# Altium PCB Motor-42.PcbDoc
Units mm, origin at the board's own origin, x right, y up, seen from the top; angles counter-clockwise.
Board outline 42.29 x 42.29 mm, 2 copper layers (Top Layer, Bottom Layer); 32 components, 33 nets, 185 pads, 49 vias.
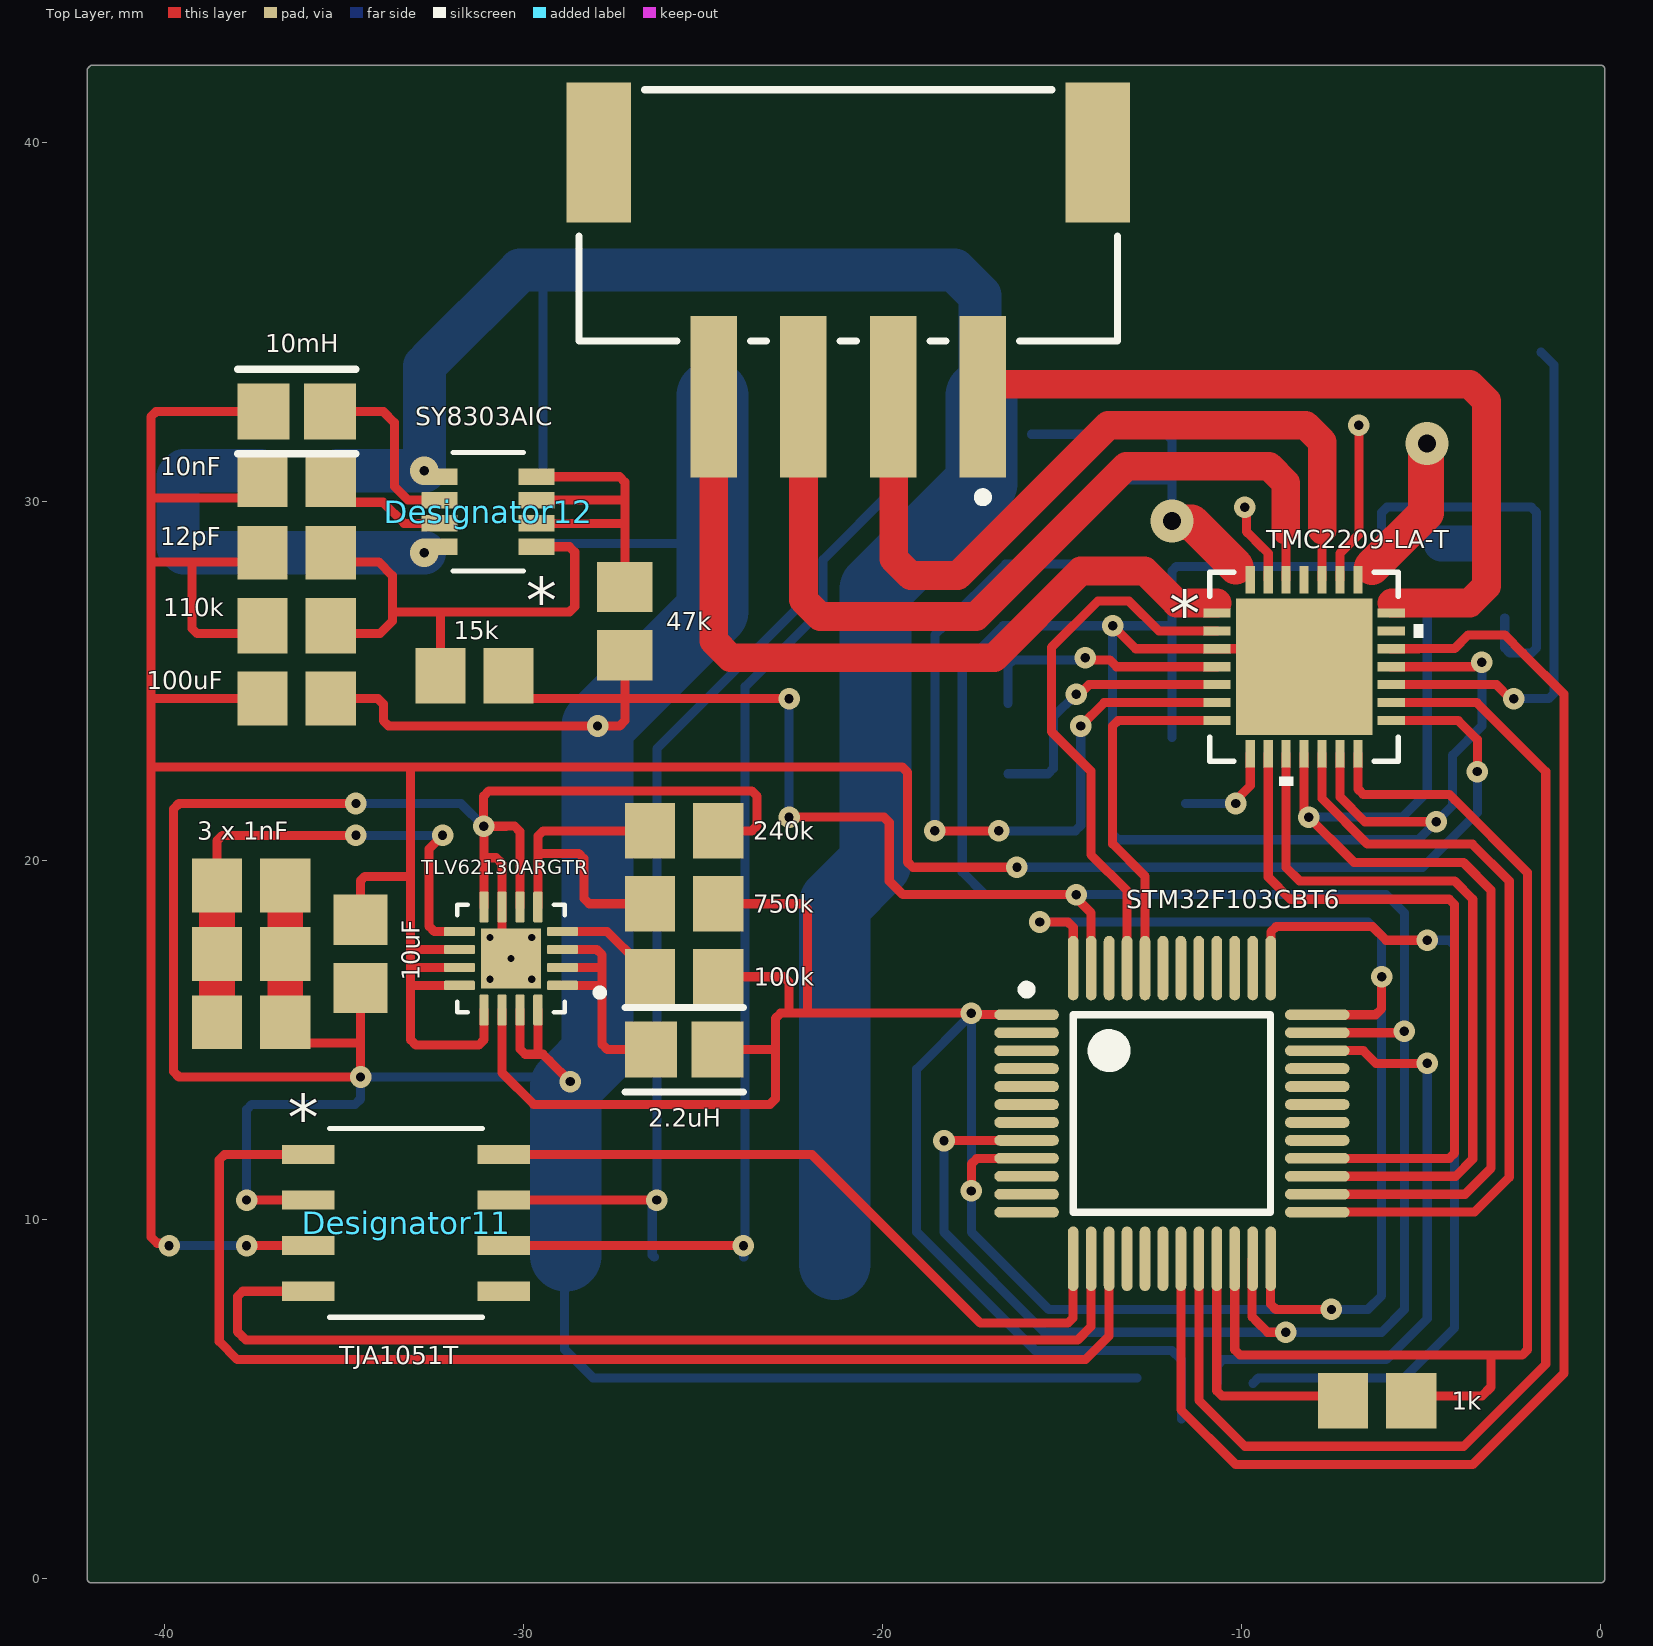
[diagram p0: Top Layer view]
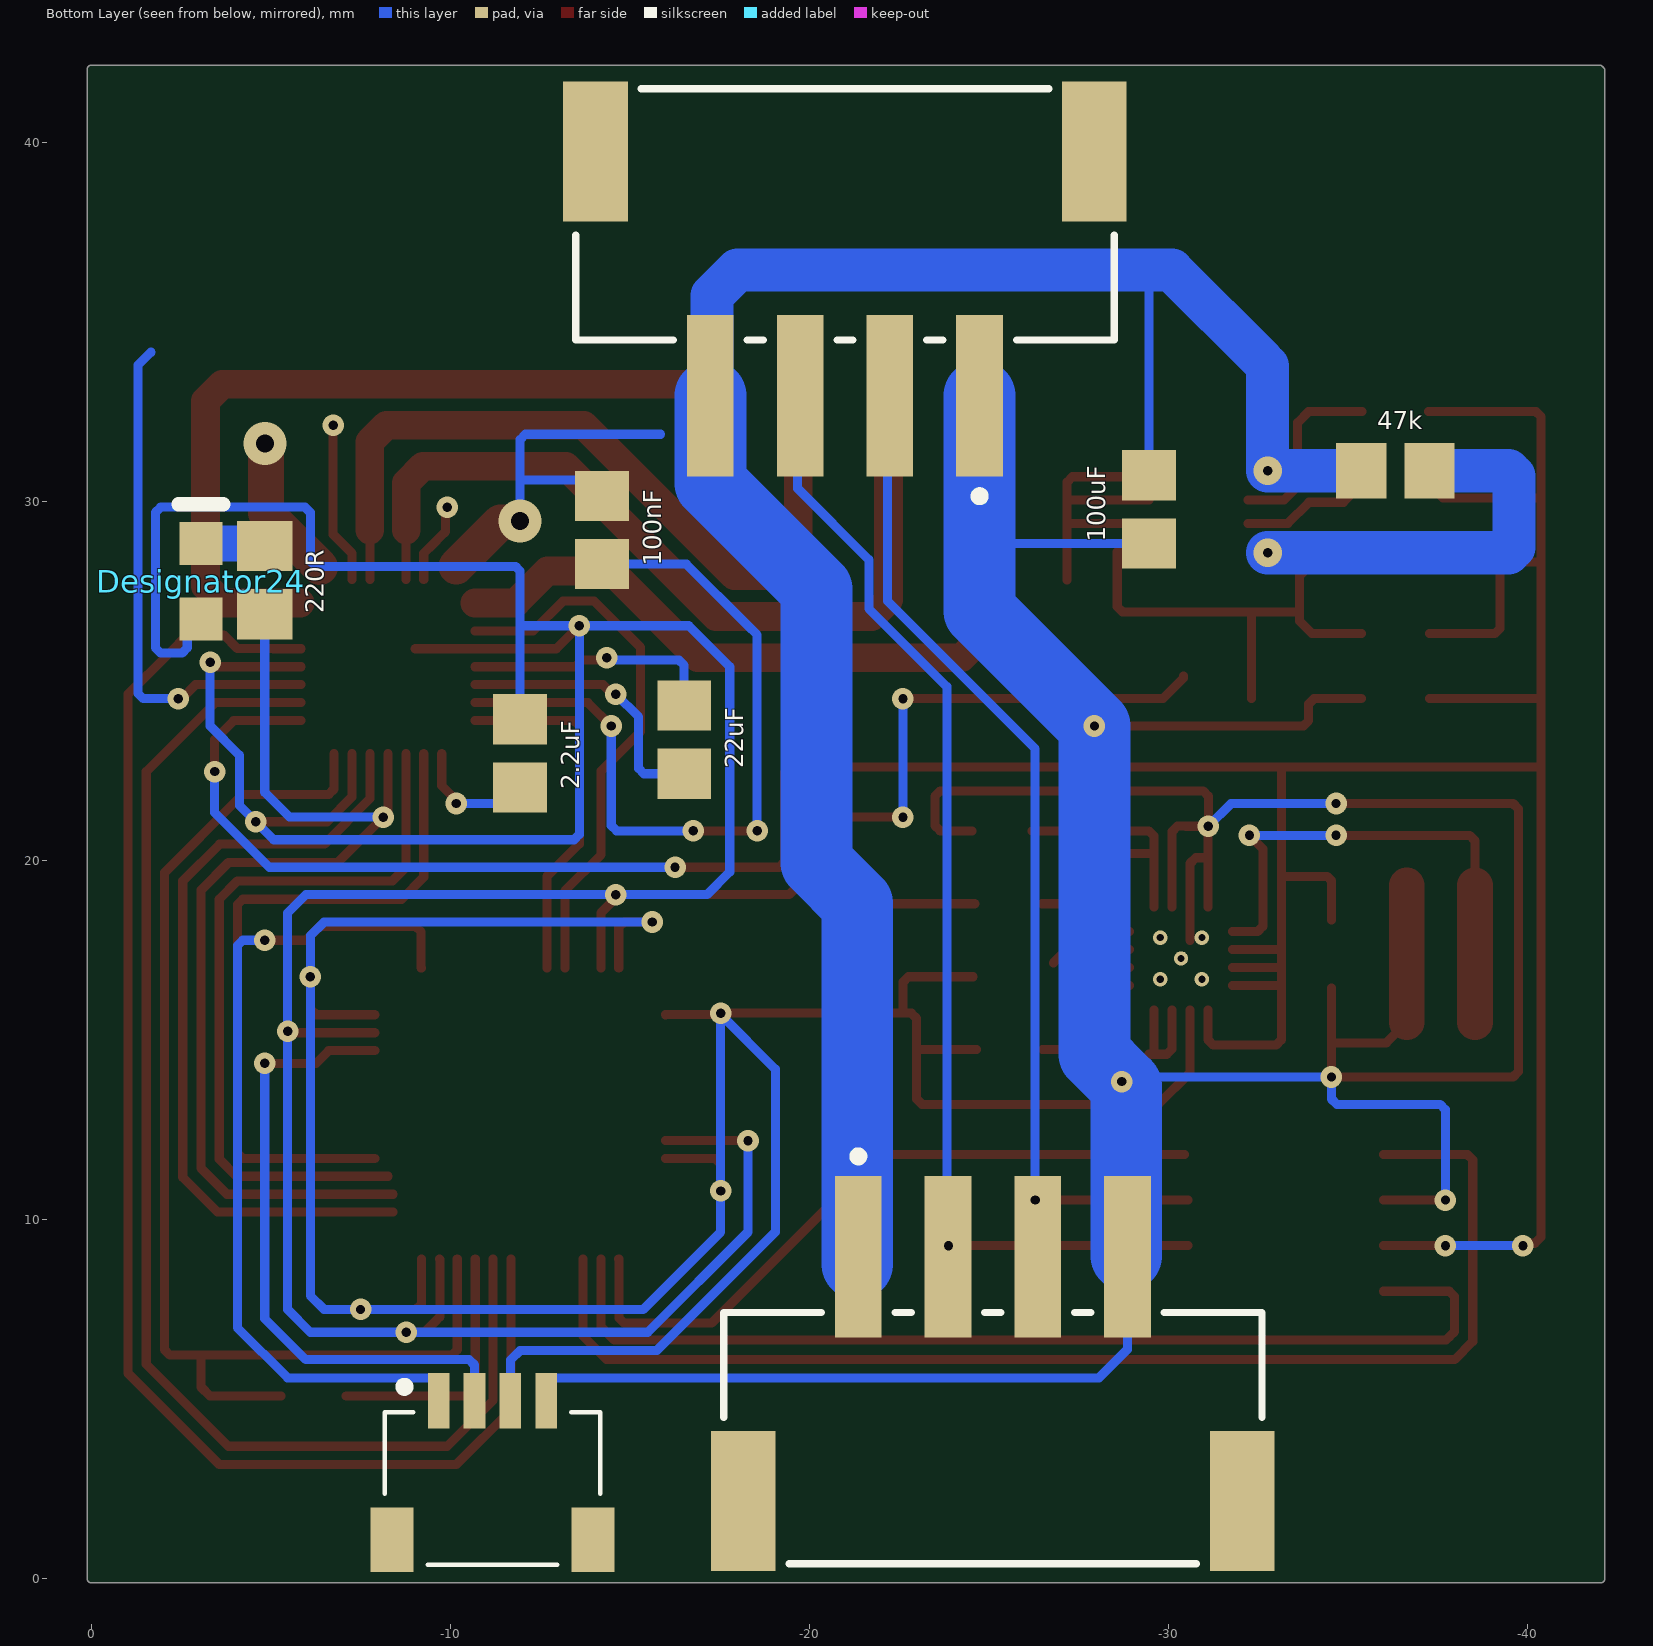
[diagram p1: Bottom Layer view, seen from below]

## Layer stack, top to bottom
Top Solder: solder mask 0.0102, Solder Resist, Dk 3.5
Top Layer: signal copper 0.0356
Dielectric 1: dielectric 0.32, FR-4, Dk 4.8
Bottom Layer: signal copper 0.0356
Bottom Solder: solder mask 0.0102, Solder Resist, Dk 3.5

## Board outline
-42.164,0 -42.164,42 cw(c-42.037,42) -42.107,42.107 cw(c-42,42.037) -42,42.164 0,42.164 cw(c0,42.037) 0.127,42.037 0.127,0 cw(c0,0) 0,-0.127 -42.037,-0.127 cw(c-42.037,0)

## Design rules (kind name [scope] priority, off if disabled: settings)
Clearance [All] p1: gap=0.26 ignorepadtopadclearanceinfootprint=FALSE
PolygonConnect [All] p1: connectstyle=Relief reliefconductorwidth=0.254 reliefentries=4 polygonreliefangle="90 Angle" airgapwidth=0.254
RoutingVias [All] p1: holewidth=0.26 width=0.6 viastyle="Through Hole" minholewidth=0.1 minwidth=0.1 maxholewidth=0.26 maxwidth=2
SolderMaskExpansion [All] p1: expansion=0.102 istentingtop=FALSE
Width Width_POWER [(InNet('VCC') OR InNet('GND'))] p1: maxlimit=3 minlimit=2 preferedwidth=2.5
Width [All] p2: maxlimit=3 minlimit=0.254 preferedwidth=0.254
30 further rules are at their usual default settings.

## Components (designator, comment, footprint, x,y, rotation, side; value= is the part's Value field where it differs from the comment)
Designator11 "TJA1051T" SO8_SOT96-1_NXP -33.274,9.906 r0 top
Designator12 "SY8303AIC" TSOT_303AIC_SGY -30.988,29.718 r180 top
Designator24 "Comment" AVAG-HSMX-C170_V -3.048,27.779 r90 bottom
STM32F103CBT6 "Comment" LQFP48_N -11.938,12.954 r0 top
TLV62130ARGTR "Comment" QFN50P300X300X100-17N -30.353,17.272 r180 top
TMC2209-LA-T "Comment" QFN28_5X5_3X8_EPAD_TRI -8.255,25.4 r0 top
? "Comment" JST_SM04B-SRSS-TB(LF)(SN) -11.168,4.953 r180 bottom
? "100uF" MURA-0805_H_1.35_M -29.464,29.784 r90 bottom
? "47k" RESC2013X60X40ML20T25 -36.322,30.861 r180 bottom
? "100uF" MURA-0805_H_1.35_M -36.322,24.511 r0 top
? "100nF" MURA-0805_H_1.35_M -14.224,29.21 r90 bottom
? "22uF" MURA-0805_H_1.35_M -16.51,23.368 r90 bottom
? "Comment" FP-S4B-XH-SM4-TB_LF_SN-MFG -20.955,37.973 r180 top
? "Comment" FP-S4B-XH-SM4-TB_LF_SN-MFG -20.99,38.001 r0 bottom
? "Comment" FP-S4B-XH-SM4-TB_LF_SN-MFG -25.111,3.909 r180 bottom
? "15k" RESC2013X60X40ML20T25 -31.369,25.146 r0 top
? "110k" RESC2013X60X40ML20T25 -36.322,26.543 r0 top
? "12pF" MURA-0805_H_1.35_M -36.322,28.575 r0 top
? "10nF" MURA-0805_H_1.35_M -36.322,30.607 r0 top
? "10mH" FP-LQM21PN_C0-IPC_A -36.322,32.512 r0 top
? "47k" RESC2013X60X40ML20T25 -27.178,26.67 r90 top
? "220R" RESC2013X60X40ML20T25 -4.826,27.813 r90 bottom
? "2.2uF" MURA-0805_H_1.35_M -11.938,22.987 r90 bottom
? "1k" RESC2013X60X40ML20T25 -6.223,4.953 r0 top
? "100k" RESC2013X60X40ML20T25 -25.527,16.764 r0 top
? "240k" RESC2013X60X40ML20T25 -25.527,20.828 r0 top
? "750k" RESC2013X60X40ML20T25 -25.527,18.796 r0 top
? "Comment" MURA-0805_H_1.35_M -37.592,15.494 r0 top
? "3 x 1nF" MURA-0805_H_1.35_M -37.592,19.304 r0 top
? "Comment" MURA-0805_H_1.35_M -37.592,17.399 r0 top
? "2.2uH" FP-LQM21PN_C0-IPC_A -25.527,14.732 r0 top
? "10uF" MURA-0805_H_1.35_M -34.544,17.399 r90 top

## Footprints (in the part's own frame and the unit in brackets; to place one, negate y for a bottom-side part, rotate by r counter-clockwise, add the part's x,y. Pads: shape width x height; smd on the part's side, far side on the other; paste and mask are expansions set on the pad)
AVAG-HSMX-C170_V [mm] "SMD, 2-Leads, Body 2x1.25mm, Height 0.8mm"
  rect 1.2x1.2 smd: 1(-1.05,0) 2(1.05,0)
  silkscreen extent 2.15,-0.63 2.15,0.63, body extent -1,-0.63 1,0.63, height 0.8
FP-LQM21PN_C0-IPC_A [mm]
  rect 1.455x1.556 smd paste+0 mask+0: 1(-0.926,0) 2(0.926,0)
  silkscreen extent -1.65,-1.18 1.65,1.18, body extent -2.15,-1.28 2.15,1.28, height 0.25
FP-S4B-XH-SM4-TB_LF_SN-MFG [mm]
  rect 1.3x4.5 smd paste+0 mask+0: 1(-3.75,5.05) 2(-1.25,5.05) 3(1.25,5.05) 4(3.75,5.05)
  rect 1.8x3.9 smd paste+0 mask+0: 5(-6.95,-1.75) 6(6.95,-1.75)
  silkscreen extent -7.5,-3.5 7.5,7.97, body extent -7.47,-3.5 7.47,6.5, height 6
JST_SM04B-SRSS-TB(LF)(SN) [mm]
  rect 0.6x1.55 smd: 1(-1.5,0) 2(-0.5,0) 3(0.5,0) 4(1.5,0)
  rect 1.2x1.8 smd: S1(-2.8,-3.875) S2(2.8,-3.875)
  silkscreen extent -3,-4.57 3,0.48
LQFP48_N [mm] "Thin QFP, 48-Leads, Body 7x7mm, Pitch 0.5mm, IPC Medium Density"
  oval 1.8x0.3 smd: 1(-4.05,2.75) 2(-4.05,2.25) 3(-4.05,1.75) 4(-4.05,1.25) 5(-4.05,0.75) 6(-4.05,0.25) 7(-4.05,-0.25) 8(-4.05,-0.75) 9(-4.05,-1.25) 10(-4.05,-1.75) 11(-4.05,-2.25) 12(-4.05,-2.75) 25(4.05,-2.75) 26(4.05,-2.25) 27(4.05,-1.75) 28(4.05,-1.25) 29(4.05,-0.75) 30(4.05,-0.25) 31(4.05,0.25) 32(4.05,0.75) 33(4.05,1.25) 34(4.05,1.75) 35(4.05,2.25) 36(4.05,2.75)
  oval 0.3x1.8 smd: 13(-2.75,-4.05) 14(-2.25,-4.05) 15(-1.75,-4.05) 16(-1.25,-4.05) 17(-0.75,-4.05) 18(-0.25,-4.05) 19(0.25,-4.05) 20(0.75,-4.05) 21(1.25,-4.05) 22(1.75,-4.05) 23(2.25,-4.05) 24(2.75,-4.05) 37(2.75,4.05) 38(2.25,4.05) 39(1.75,4.05) 40(1.25,4.05) 41(0.75,4.05) 42(0.25,4.05) 43(-0.25,4.05) 44(-0.75,4.05) 45(-1.25,4.05) 46(-1.75,4.05) 47(-2.25,4.05) 48(-2.75,4.05)
  silkscreen extent -4.17,-2.75 2.75,3.57, body extent -3.5,-3.5 3.5,3.5, height 1.6
MURA-0805_H_1.35_M [mm] "SMD, 2-Leads, Body 2.1x1.35mm, IPC Low Density"
  rect 1.4x1.5 smd: 1(-0.95,0) 2(0.95,0)
  body extent -1.05,-0.67 1.05,0.67, height 1.35
QFN28_5X5_3X8_EPAD_TRI [mil]
  rect 30x10 smd paste+0 mask+0: 1(-95.5,59.06) 2(-95.5,39.37) 3(-95.5,19.68) 4(-95.5,0) 5(-95.5,-19.68) 6(-95.5,-39.37) 7(-95.5,-59.06) 15(95.5,-59.06) 16(95.5,-39.37) 17(95.5,-19.68) 18(95.5,0) 19(95.5,19.68) 20(95.5,39.37) 21(95.5,59.06)
  rect 10x30 smd paste+0 mask+0: 8(-59.06,-95.5) 9(-39.37,-95.5) 10(-19.69,-95.5) 11(0,-95.5) 12(19.69,-95.5) 13(39.37,-95.5) 14(59.06,-95.5) 22(59.06,95.5) 23(39.37,95.5) 24(19.69,95.5) 25(0,95.5) 26(-19.69,95.5) 27(-39.37,95.5) 28(-59.06,95.5)
  rect 149.61x149.61 smd paste+0 mask+0: 29(0,0)
  silkscreen extent -104,-130 130,104, body extent -99,-99 99,99, height 35
QFN50P300X300X100-17N [mm]
  rrect25% 0.86x0.26 smd: 1(-1.435,0.75) 2(-1.435,0.25) 3(-1.435,-0.25) 4(-1.435,-0.75) 9(1.435,-0.75) 10(1.435,-0.25) 11(1.435,0.25) 12(1.435,0.75)
  rrect25% 0.26x0.86 smd: 5(-0.75,-1.435) 6(-0.25,-1.435) 7(0.25,-1.435) 8(0.75,-1.435) 13(0.75,1.435) 14(0.25,1.435) 15(-0.25,1.435) 16(-0.75,1.435)
  rect 1.68x1.68 smd paste-0.31: 17(0,0)
  round 0.4 hole 0.2 mask+0: 18(0,0) 19(-0.58,0.58) 20(0.58,0.58) 21(-0.58,-0.58) 22(0.58,-0.58)
  silkscreen extent -2.57,-1.5 1.5,1.5, body extent -1.5,-1.5 1.5,1.5, height 1
RESC2013X60X40ML20T25 [mm] "Chip Resistor, 2-Leads, Body 2.00x1.25mm, IPC Low Density"
  rect 1.4x1.55 smd: 1(-0.95,0) 2(0.95,0)
  body extent -1.1,-0.72 1.1,0.72, height 0.6
SO8_SOT96-1_NXP [mil]
  rect 57.5x21 smd paste+0 mask+0: 1(-107.25,75) 2(-107.25,25) 3(-107.25,-25) 4(-107.25,-75) 5(107.25,-75) 6(107.25,-25) 7(107.25,25) 8(107.25,75)
  silkscreen extent -84,-104 84,104, body extent -122,-99 122,99, height 69
TSOT_303AIC_SGY [mil]
  rect 39.5x18 smd paste+0 mask+0: 1(-53.25,38.39) 2(-53.25,12.8) 3(-53.25,-12.8) 4(-53.25,-38.39) 5(53.25,-38.39) 6(53.25,-12.8) 7(53.25,12.8) 8(53.25,38.39)
  silkscreen extent -39,-65 39,65, body extent -59,-60 59,60, height 43

## Via types
v1: diameter 0.6, hole 0.26, Top Layer to Bottom Layer, 40 vias
v2: diameter 0.4, hole 0.2, Top Layer to Bottom Layer, 5 vias
v3: diameter 1.2, hole 0.5, Top Layer to Bottom Layer, 2 vias
v4: diameter 0.8, hole 0.26, Top Layer to Bottom Layer, 2 vias

## Nets (pads, with @x,y where several pads share a name; then routed paths per layer and width w, separated by ;. In a path a pad name is that pad's centre, name@x,y a point inside that pad or via, vN(x,y) a via of type N, cw(c..) or ccw(c..) an arc to the next point about the centre after c; other vN are vias at no path point)
GND: 
NetC?_1: 
NetC?_2: 
NetCin?_1: 
NetCin?_2: 
NetCout_2: 
NetCss?_1: 
NetCss?_2: 
NetCss_2: 
NetL1_1: 
NetL?_1: 
NetP1_1: 
NetP1_3: 
NetP1_4: 
NetP1_5: 
NetP3_3: 
NetP3_4: 
NetR1_1: 
NetR3_1: 
NetREN?_1: 
NetREN?_2: 
NetREN_1: 
NetRfs_2: 
NetU1_18: 
NetU1_19: 
NetU1_31: 
NetU1_32: 
NetU1_33: 
NetU1_41: 
NetU1_42: 
NetU1_43: 
NetU1_45: 
VCC: 
pads on no net: ?.1 ?.2 ?.3 ?.4 ?.5 ?.6 ?.S1 ?.S2 Designator11.1 Designator11.2 Designator11.3 Designator11.4 Designator11.5 Designator11.6 Designator11.7 Designator11.8 Designator12.1 Designator12.2 Designator12.3 Designator12.4 Designator12.5 Designator12.6 Designator12.7 Designator12.8 Designator24.1 Designator24.2 STM32F103CBT6.1 STM32F103CBT6.2 STM32F103CBT6.3 STM32F103CBT6.4 STM32F103CBT6.5 STM32F103CBT6.6 STM32F103CBT6.7 STM32F103CBT6.8 STM32F103CBT6.9 STM32F103CBT6.10 STM32F103CBT6.11 STM32F103CBT6.12 STM32F103CBT6.13 STM32F103CBT6.14 STM32F103CBT6.15 STM32F103CBT6.16 STM32F103CBT6.17 STM32F103CBT6.18 STM32F103CBT6.19 STM32F103CBT6.20 STM32F103CBT6.21 STM32F103CBT6.22 STM32F103CBT6.23 STM32F103CBT6.24 STM32F103CBT6.25 STM32F103CBT6.26 STM32F103CBT6.27 STM32F103CBT6.28 STM32F103CBT6.29 STM32F103CBT6.30 STM32F103CBT6.31 STM32F103CBT6.32 STM32F103CBT6.33 STM32F103CBT6.34 STM32F103CBT6.35 STM32F103CBT6.36 STM32F103CBT6.37 STM32F103CBT6.38 STM32F103CBT6.39 STM32F103CBT6.40 STM32F103CBT6.41 STM32F103CBT6.42 STM32F103CBT6.43 STM32F103CBT6.44 STM32F103CBT6.45 STM32F103CBT6.46 STM32F103CBT6.47 STM32F103CBT6.48 TLV62130ARGTR.1 TLV62130ARGTR.2 TLV62130ARGTR.3 TLV62130ARGTR.4 TLV62130ARGTR.5 TLV62130ARGTR.6 TLV62130ARGTR.7 TLV62130ARGTR.8 TLV62130ARGTR.9 TLV62130ARGTR.10 TLV62130ARGTR.11 TLV62130ARGTR.12 TLV62130ARGTR.13 TLV62130ARGTR.14 TLV62130ARGTR.15 TLV62130ARGTR.16 TLV62130ARGTR.17 TLV62130ARGTR.18 TLV62130ARGTR.19 TLV62130ARGTR.20 TLV62130ARGTR.21 TLV62130ARGTR.22 TMC2209-LA-T.1 TMC2209-LA-T.2 TMC2209-LA-T.3 TMC2209-LA-T.4 TMC2209-LA-T.5 TMC2209-LA-T.6 TMC2209-LA-T.7 TMC2209-LA-T.8 TMC2209-LA-T.9 TMC2209-LA-T.10 TMC2209-LA-T.11 TMC2209-LA-T.12 TMC2209-LA-T.13 TMC2209-LA-T.14 TMC2209-LA-T.15 TMC2209-LA-T.16 TMC2209-LA-T.17 TMC2209-LA-T.18 TMC2209-LA-T.19 TMC2209-LA-T.20 TMC2209-LA-T.21 TMC2209-LA-T.22 TMC2209-LA-T.23 TMC2209-LA-T.24 TMC2209-LA-T.25 TMC2209-LA-T.26 TMC2209-LA-T.27 TMC2209-LA-T.28 TMC2209-LA-T.29
copper on no net: | length 1189.9
  Top Layer w0.254: -40.259,24.511 -37.272,24.511 ; v1(-39.878,9.271) -39.944,9.337 -40.208,9.337 -40.386,9.516 -40.386,22.606 ; -38.542,19.304 -38.542,20.552 -38.393,20.701 v1(-34.671,20.701) ; v1(-37.719,9.271) -35.998,9.271 ; v1(-37.719,10.541) -35.998,10.541 ; -37.278,26.321 -39.094,26.321 -39.243,26.469 -39.243,28.321 ; -37.272,28.321 -39.243,28.321 ; -37.272,30.48 -37.653,30.099 -40.386,30.099 ; -37.248,32.512 -40.237,32.512 -40.386,32.363 -40.386,30.099 ; -36.642,15.494 -36.069,14.921 -34.544,14.921 ; -35.998,8.001 -37.824,8.001 -37.973,7.852 -37.973,6.88 -37.824,6.731 -37.733,6.64 -14.569,6.64 -14.188,7.021 -14.188,8.904 ; -35.998,11.811 -38.332,11.811 -38.481,11.662 -38.481,6.604 -37.973,6.096 -14.351,6.096 -13.688,6.759 -13.688,8.904 ; -35.396,32.512 -33.909,32.512 -33.599,32.202 -33.599,30.424 -33.218,30.043 -32.214,30.043 ; -35.378,26.321 -34.004,26.321 -33.655,26.67 -33.655,26.924 ; -35.372,24.511 -34.058,24.511 -33.909,24.362 -33.909,23.898 -33.76,23.749 -28.627,23.749 v1(-27.94,23.749) -27.327,23.749 -27.178,23.898 -27.178,24.13 -27.178,24.511 ; -35.372,28.321 -34.036,28.321 -33.655,27.94 -33.655,26.924 ; -35.372,30.48 -34.876,29.984 -33.921,29.984 -33.909,29.972 -33.33,29.393 -32.214,29.393 ; v1(-34.671,21.59) -39.602,21.59 -39.751,21.441 -39.751,14.119 -39.602,13.97 v1(-34.544,13.97) -34.544,14.627 -34.544,14.921 ; -34.544,16.449 -34.544,14.921 ; -34.544,18.349 -34.544,19.436 -34.422,19.558 -33.147,19.558 ; -33.02,16.522 -31.788,16.522 ; -33.02,17.022 -31.788,17.022 ; -33.02,17.522 -31.788,17.522 ; -32.319,24.511 -32.319,26.924 ; v1(-32.258,20.701) -32.633,20.326 -32.633,18.436 -32.633,18.171 -32.484,18.022 -31.788,18.022 ; -31.103,15.837 -31.103,15.008 -31.252,14.859 -32.998,14.859 -33.147,15.008 -33.147,16.522 -33.147,17.022 -33.147,17.522 -33.147,19.558 ; -31.103,18.707 -31.103,20.079 ; -30.603,15.837 -30.603,14.093 -29.718,13.208 -23.136,13.208 -22.987,13.357 -22.987,14.732 ; -30.603,17.78 -30.603,19.917 -30.765,20.079 -31.103,20.079 ; -30.55,9.271 v1(-23.876,9.271) ; -30.55,10.541 v1(-26.289,10.541) ; -30.451,11.811 -21.971,11.811 -17.272,7.112 -14.84,7.112 -14.691,7.261 -14.691,8.901 -14.688,8.904 ; -30.419,25.146 -30.419,25.084 -29.846,24.511 -27.178,24.511 ; -30.103,15.837 -30.103,14.754 -29.954,14.605 -29.591,14.605 -29.6,14.614 -29.6,15.834 -29.603,15.837 ; -30.103,18.707 -30.103,20.809 -30.252,20.958 -30.485,20.958 -30.488,20.955 v1(-31.115,20.955) ; -29.635,28.743 -28.724,28.743 -28.575,28.594 -28.575,27.073 -28.724,26.924 -32.319,26.924 ; -29.635,30.693 -27.327,30.693 -27.178,30.544 -27.178,30.043 ; -29.603,18.707 -29.603,20.201 ; -29.6,14.605 -29.464,14.605 -29.284,14.425 v1(-28.702,13.843) ; -29.464,29.393 -27.178,29.393 ; -29.464,30.043 -27.178,30.043 ; -28.918,16.522 -27.813,16.522 ; -28.918,17.022 -27.887,17.022 -27.813,16.948 ; -28.918,17.522 -27.962,17.522 -27.813,17.373 -27.813,17.022 -27.813,16.522 ; -28.918,18.022 -27.674,18.022 -26.797,17.145 ; -27.178,25.72 -27.178,24.511 ; -27.178,27.813 -27.178,29.393 ; -26.489,14.732 -27.664,14.732 -27.813,14.881 -27.813,16.522 ; -26.477,18.796 -28.172,18.796 -28.321,18.945 -28.321,20.052 -28.47,20.201 -29.603,20.201 ; -26.201,20.828 -29.454,20.828 -29.603,20.679 -29.603,20.201 ; -24.651,14.732 -22.987,14.732 ; -24.606,18.796 -22.241,18.796 -22.092,18.647 -22.092,15.748 ; -24.553,16.764 -22.755,16.764 -22.606,16.615 -22.606,15.748 ; -24.533,20.828 -23.644,20.828 -23.495,20.977 -23.495,21.791 -23.644,21.939 -30.966,21.939 -31.115,21.791 v1(-31.115,20.955) ; v1(-22.606,21.209) -21.59,21.209 -19.961,21.209 -19.812,21.06 -19.812,19.431 -19.431,19.05 v1@-14.756,19.05 ; v1(-22.606,24.511) -27.178,24.511 ; v1(-18.542,20.828) v1(-16.764,20.828) ; v1@-18.276,12.204 -15.988,12.204 ; v1(-17.526,10.795) -17.526,11.546 -17.377,11.695 -15.997,11.695 -15.988,11.704 ; v1(-16.256,19.812) -19.155,19.812 -19.304,19.961 -19.304,22.457 -19.453,22.606 -33.147,22.606 ; -15.988,15.704 -15.997,15.713 -17.491,15.713 v1(-17.526,15.748) -22.092,15.748 ; v1(-15.621,18.288) -14.837,18.288 -14.688,18.139 -14.688,17.004 ; v1(-14.605,19.05) -14.605,18.956 -14.188,18.539 -14.188,18.324 -14.188,17.004 ; v1(-14.605,24.638) -14.511,24.638 -14.249,24.9 -13.797,24.9 -10.681,24.9 ; v1(-14.478,23.749) -13.827,24.4 -10.681,24.4 ; v1(-14.351,25.654) -14.288,25.591 -13.67,25.591 -13.479,25.4 -12.954,25.4 -10.681,25.4 ; v1(-13.589,26.543) -12.946,25.9 -9.017,25.9 ; -13.188,17.004 -13.188,19.157 -14.196,20.165 -14.196,22.495 -15.292,23.591 -15.292,25.939 -14.001,27.23 -13.133,27.23 -12.303,26.4 -10.681,26.4 ; -12.688,17.004 -12.688,19.564 -13.589,20.465 -13.589,20.73 -13.589,23.751 -13.44,23.9 -10.681,23.9 ; -11.688,8.904 -11.688,4.703 -10.16,3.175 -3.556,3.175 -1.016,5.715 -1.016,24.638 -2.159,25.781 -2.667,26.289 -3.683,26.289 -4.064,25.908 -5.059,25.908 -5.067,25.9 -5.829,25.9 ; -11.188,8.904 -11.188,4.965 -9.906,3.683 -3.81,3.683 -1.524,5.969 -1.524,22.479 -3.445,24.4 -5.829,24.4 ; -10.688,8.904 -10.688,5.229 -10.539,5.08 -7.094,5.08 ; -10.188,8.904 -10.188,6.372 -10.039,6.223 -9.531,6.223 -9.1,6.223 -3.048,6.223 -2.181,6.223 -2.032,6.372 -2.032,19.663 -4.064,21.695 -4.213,21.844 -6.606,21.844 -6.755,21.993 -6.755,22.974 ; v1(-10.16,21.59) -10.16,21.684 -9.755,22.089 -9.755,22.974 ; v1(-9.906,29.845) -9.86,29.799 -9.86,29.164 -9.733,29.037 -9.525,28.829 -9.255,28.559 -9.255,27.826 ; -9.688,8.904 -9.702,8.89 -9.702,7.289 -9.571,7.158 -9.271,6.858 v1(-8.763,6.858) ; -9.255,22.974 -9.255,19.542 -8.636,18.923 -4.213,18.923 -4.064,18.774 -4.064,11.853 -4.213,11.704 -7.888,11.704 ; -9.188,8.904 -9.188,7.642 -9.039,7.493 v1(-7.493,7.493) ; -9.188,17.004 -9.179,17.013 -9.179,18.012 -9.03,18.161 -6.35,18.161 -5.969,17.78 v1(-4.826,17.78) ; -8.755,22.974 -8.755,19.804 -8.382,19.431 -4.064,19.431 -3.556,18.923 -3.556,11.684 -4.036,11.204 -8.255,11.204 ; -8.755,27.826 -8.755,29.026 ; -8.396,10.204 -3.512,10.204 -2.54,11.176 -2.54,19.431 -3.568,20.459 -6.489,20.459 -7.755,21.725 -7.755,22.974 ; -8.396,10.704 -3.774,10.704 -3.048,11.43 -3.048,19.177 -3.816,19.945 -6.864,19.945 -8.255,21.336 -8.255,22.974 ; -7.888,14.704 -6.607,14.704 -6.254,14.351 v1(-4.826,14.351) ; -7.888,15.204 -5.497,15.204 v1(-5.461,15.24) ; -7.888,15.704 -6.267,15.704 -6.096,15.875 v1(-6.096,16.764) ; -7.755,27.826 -7.755,29.026 ; -7.255,22.974 -7.255,21.86 -7.255,21.774 -6.563,21.082 v1(-4.572,21.082) ; -7.255,27.826 -7.255,28.559 -6.731,29.083 -6.731,30.513 v1(-6.731,32.131) ; -5.829,23.9 -4.04,23.9 -3.961,23.9 -3.429,23.368 v1(-3.429,22.479) ; -5.829,24.9 -2.896,24.9 -2.507,24.511 v1(-2.413,24.511) ; -5.829,25.4 -3.523,25.4 -3.396,25.527 v1(-3.302,25.527) ; -5.273,5.08 -3.302,5.08 -3.048,5.334 -3.048,6.096 ; -40.386,22.606 -40.386,24.511 -40.386,28.321 ; -40.386,22.606 -33.147,22.606 ; -40.386,28.321 -40.386,30.099 ; -40.386,28.321 -39.243,28.321 ; -33.655,26.924 -32.319,26.924 ; -33.147,19.558 -33.147,22.606 ; v1(-31.115,20.955) -31.103,20.943 -31.103,20.079 ; -27.178,29.393 -27.178,30.043 ; -22.987,14.732 -22.987,15.599 -22.838,15.748 -22.606,15.748 ; -22.606,15.748 -22.092,15.748
  Top Layer w0.8: -24.705,32.923 -24.705,26.123 -24.236,25.654 -16.891,25.654 -14.478,28.067 -12.7,28.067 -11.811,27.178 -10.681,27.178 ; -22.205,32.923 -22.205,27.266 -21.736,26.797 -17.399,26.797 -13.208,30.988 -9.232,30.988 -8.763,30.519 -8.763,29.21 ; -19.685,31.115 -19.685,28.409 -19.216,27.94 -17.907,27.94 -13.716,32.131 -8.216,32.131 -7.747,31.662 -7.747,29.21 ; -17.205,32.923 -16.955,33.173 -16.955,33.274 -3.644,33.274 -3.175,32.805 -3.175,27.647 -3.644,27.178 -5.815,27.178
  Top Layer w1: -38.542,15.494 -38.542,17.399 -38.542,19.304 ; -36.642,15.494 -36.642,17.399 -36.642,19.304 ; v3(-11.938,29.464) -11.9,29.426 -11.392,29.426 -10.16,28.194 ; -6.364,28.18 -4.864,29.68 -4.864,31.585 v3(-4.826,31.623)
  Bottom Layer w0.254: v1(-39.878,9.271) v1(-37.719,9.271) ; v1(-37.719,10.541) -37.719,13.059 -37.57,13.208 -34.693,13.208 -34.544,13.357 v1(-34.544,13.97) -28.923,13.97 -28.796,13.843 v1(-28.702,13.843) ; v1(-34.671,20.701) v1(-32.258,20.701) ; v1(-34.671,21.59) -31.75,21.59 v1(-31.115,20.955) ; v4@-33.041,30.734 -32.914,30.861 v4(-32.766,30.861) ; -32.766,33.782 -32.639,33.909 ; -29.464,28.834 -24.74,28.834 ; -29.464,30.922 -29.464,36.449 ; -28.829,8.991 -28.861,8.959 -28.861,6.382 -28.68,6.201 -28.067,5.588 -12.911,5.588 ; -26.361,8.959 -26.416,9.014 -26.416,10.414 v1(-26.289,10.541) -26.289,23.114 -22.17,27.233 -22.17,33.332 ; -23.876,8.959 v1(-23.876,9.271) ; -23.861,8.959 -23.861,9.271 -23.829,9.303 -23.829,24.847 -21.656,27.02 -21.656,28.382 -19.685,30.353 -19.67,30.368 -19.67,33.332 ; v1(-22.606,21.209) v1(-22.606,24.511) ; v1(-18.542,20.828) -18.542,26.289 -18.288,26.543 -16.571,28.26 -14.224,28.26 ; v1(-18.288,12.192) -18.288,9.652 -15.494,6.858 v1(-8.763,6.858) -7.764,6.858 -6.096,6.858 -5.461,7.493 -5.461,11.447 v1(-5.461,15.24) -5.461,18.542 -5.969,19.05 -10.494,19.05 v1(-14.605,19.05) -17.145,19.05 -17.78,19.685 -17.78,25.4 -16.637,26.543 v1(-13.589,26.543) ; v1(-17.526,15.748) v1(-17.526,10.795) -17.526,9.652 -15.367,7.493 -11.223,7.493 v1(-7.493,7.493) -6.477,7.493 -6.096,7.874 v1(-6.096,16.764) -6.096,17.907 -6.477,18.288 -11.383,18.288 v1(-15.621,18.288) ; v1@-17.508,15.73 -19.05,14.189 -19.05,9.652 -15.748,6.35 -11.938,6.35 -11.676,6.088 -11.676,4.445 ; v1(-16.764,20.828) -15.828,20.828 -14.627,20.828 -14.478,20.977 v1(-14.478,23.749) ; -16.51,22.418 -15.389,22.418 -15.24,22.567 -15.24,24.003 v1(-14.605,24.638) ; -16.51,24.384 -16.51,25.439 -16.361,25.588 -14.417,25.588 v1(-14.351,25.654) ; v1(-16.256,19.812) -12.384,19.812 -4.953,19.812 -3.429,21.336 v1(-3.429,22.479) ; -15.853,31.877 -12.087,31.877 -11.938,31.728 -11.938,30.607 ; -13.97,30.607 -11.938,30.607 ; -11.963,26.543 -13.468,26.543 v1(-13.589,26.543) ; -11.938,23.429 -11.938,26.543 -11.938,28.067 ; v3(-11.938,29.464) -11.938,30.607 ; -11.92,28.085 -11.811,28.194 -6.245,28.194 -6.096,28.343 -6.096,29.696 -5.947,29.845 -1.927,29.845 -1.778,29.696 -1.778,25.93 -1.927,25.781 -2.518,25.781 -2.667,25.93 -2.667,26.763 ; -11.557,21.59 v1(-10.16,21.59) ; -10.668,5.461 -10.668,5.947 -10.519,6.096 -5.969,6.096 -4.826,7.239 v1(-4.826,14.351) ; -9.676,5.439 -9.527,5.588 -5.461,5.588 -4.064,6.985 -4.064,17.631 -4.213,17.78 v1(-4.826,17.78) ; v1(-8.128,21.209) -5.519,21.209 -4.826,21.902 -4.826,26.863 ; v1(-3.302,25.527) -3.302,23.749 -4.116,22.935 -4.116,22.625 -4.116,21.538 v1(-4.572,21.082) -5.074,20.58 -5.213,20.58 -9.912,20.58 -13.44,20.58 -13.589,20.729 v1(-13.589,26.543) ; v1(-2.413,24.511) -1.441,24.511 -1.292,24.66 -1.292,33.804 -1.651,34.163
  Bottom Layer w1: -4.429,28.829 -3.429,28.829
  Bottom Layer w1.2: -37.333,30.861 -39.475,30.861 -39.624,30.712 -39.624,28.724 -39.475,28.575 v4(-32.766,28.575) ; -35.179,30.861 v4(-32.766,30.861) -32.766,33.782 ; -32.639,33.909 -30.099,36.449 -29.464,36.449 -17.993,36.449 -17.29,35.746 -17.29,33.001 -17.24,32.951
  Bottom Layer w2: -28.829,8.991 -28.829,13.716 v1(-28.702,13.843) -27.94,14.605 v1(-27.94,23.749) -24.74,26.949 -24.74,28.834 -24.74,32.951 ; -21.329,8.763 -21.329,18.803 -20.193,19.939 -20.193,27.559 -17.24,30.512 -17.24,32.951
  other v2: -30.933,16.692 -29.773,16.692 -30.353,17.272 -30.933,17.852 -29.773,17.852

## Text inside footprints (layer, text, board x,y; h text height)
Designator11: Top Overlay "*" at -36.57,12.217 h1.27; Mechanical 13 "*" at -35.204,11.062 h1.27
Designator12: Top Overlay "*" at -29.064,28.413 h1.27 r180; Mechanical 13 "*" at -30.201,29.54 h1.27 r180
TMC2209-LA-T: Top Overlay "*" at -12.014,26.265 h1.27; Mechanical 13 "*" at -9.982,26.265 h1.27